# Altium PCB Throughhole final PCB.PcbDoc
Units mm, origin at the board's own origin, x right, y up, seen from the top; angles counter-clockwise.
Board outline 85 x 85 mm, 2 copper layers (Top Layer, Bottom Layer); 27 components, 24 nets, 117 pads, 39 vias.
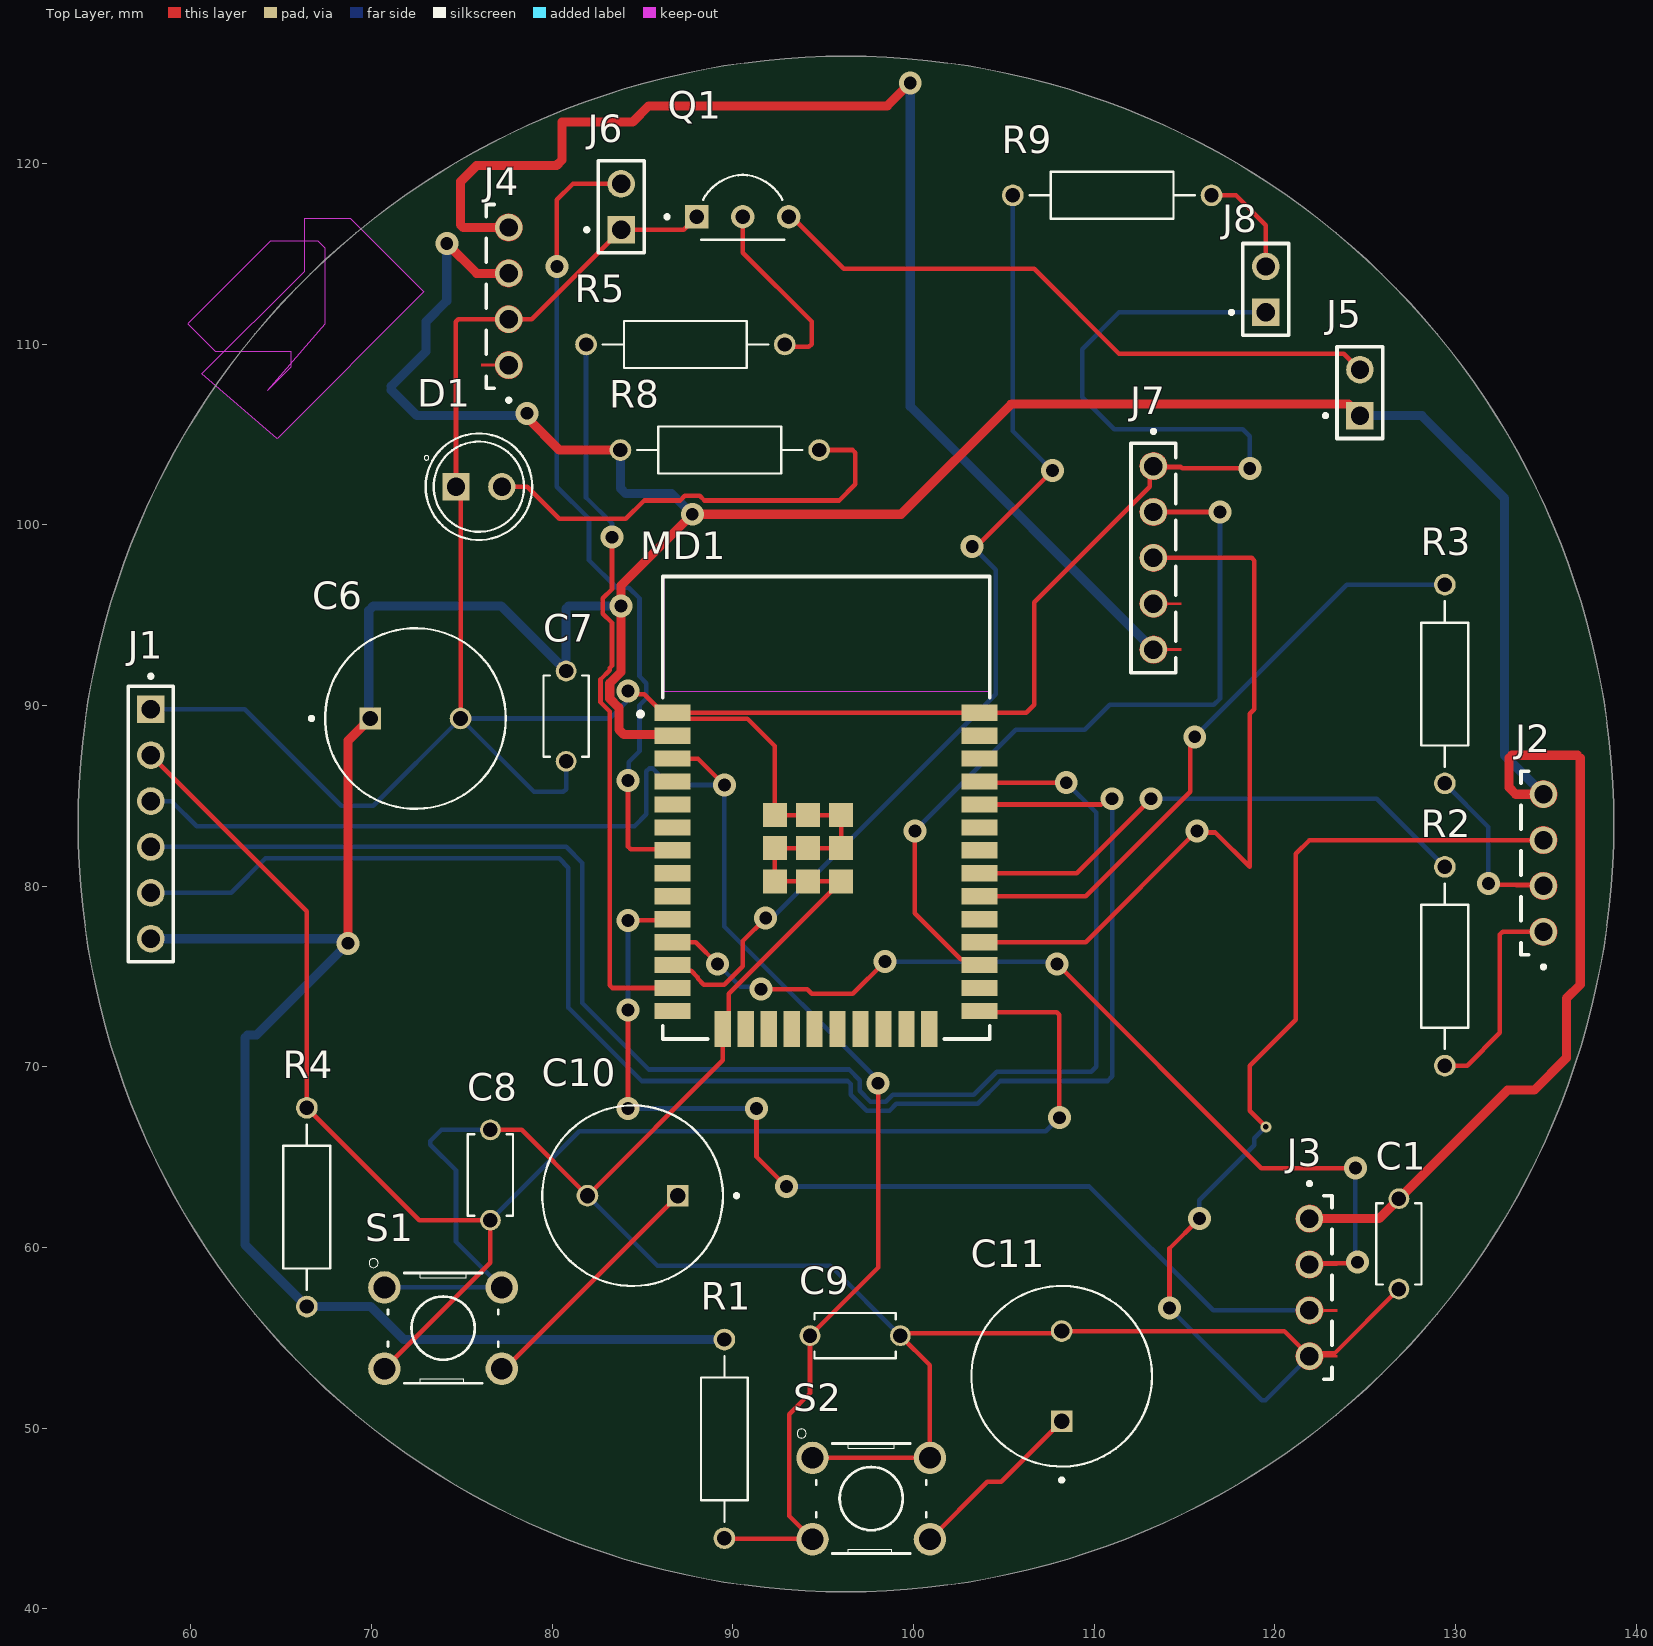
[diagram p0: Top Layer view]
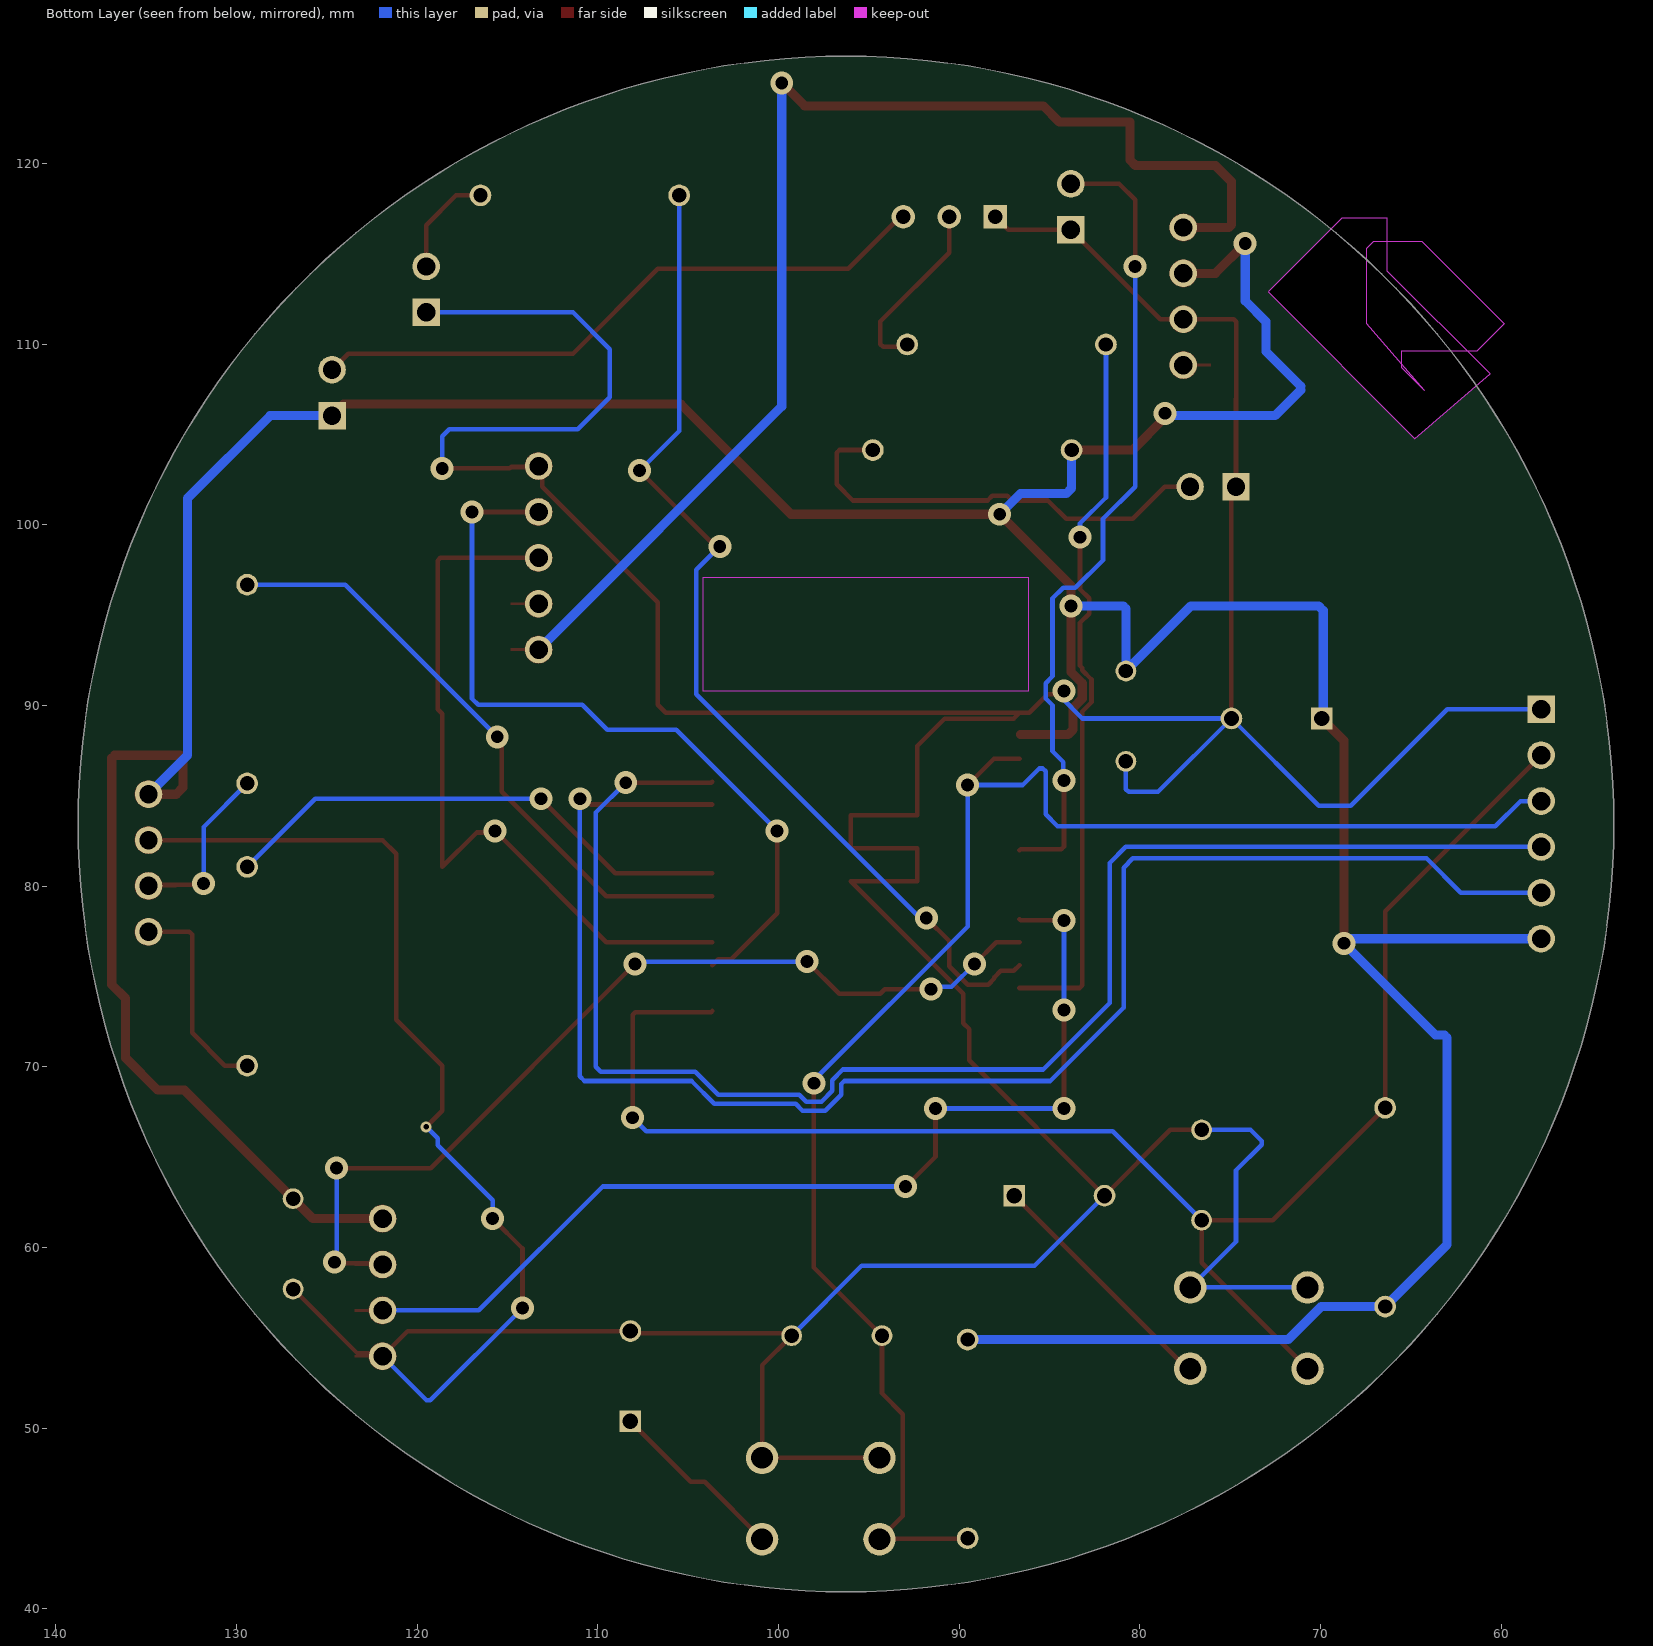
[diagram p1: Bottom Layer view, seen from below]

## Layer stack, top to bottom
Top Solder: solder mask 0.0102, Solder Resist, Dk 3.5
Top Layer: signal copper 0.0356
Dielectric 1: dielectric 0.32, FR-4, Dk 4.8
Bottom Layer: signal copper 0.0356
Bottom Solder: solder mask 0.0102, Solder Resist, Dk 3.5

## Board outline
53.766,83.439 ccw(c96.266,83.439) 96.266,40.939 ccw(c96.266,83.439) 138.766,83.439 ccw(c96.266,83.439) 96.266,125.939 ccw(c96.266,83.439)
cut-out: 67.437,111.125 67.437,115.316 67.056,115.697 64.389,115.697 59.817,111.125 61.341,109.601 65.532,109.601 65.532,108.712 64.262,107.442
cut-out: 60.61,108.362 66.294,114.046 66.294,116.967 68.834,116.967 72.898,112.903 64.77,104.775

## Design rules (kind name [scope] priority, off if disabled: settings)
BoardOutlineClearance [All] p1: gap=0.2 ignorepadtopadclearanceinfootprint=FALSE
Clearance [All] p1: gap=0.127 ignorepadtopadclearanceinfootprint=FALSE except(0.25: Arc-Hole Track-Hole SMDPad-Hole THPad-Hole Via-Hole Fill-Hole Poly-Hole Region-Hole Text-Hole)
ComponentClearance [All] p1: gap=0.127 collisioncheckmode=3 verticalgap=0.127 showdistances=TRUE
DiffPairsRouting [All] p1: maxlimit=0.254 minlimit=0.127 mostfreqgap=0.127 toplayer_minwidth=0.127 toplayer_maxwidth=25.4 toplayer_prefwidth=0.127 bottomlayer_minwidth=0.127 bottomlayer_maxwidth=25.4 bottomlayer_prefwidth=0.127 maxuncoupledlength=12.7
Height [All] p1: minheight=0 maxheight=1816.048 prefheight=12.7
HoleSize [All] p1: absolutevalues=TRUE maxlimit=6.3 minlimit=0.3 maxpercent=80.000 minpercent=20.000
HoleToHoleClearance [All] p1: gap=0.25 allowstackedmicrovias=FALSE
MinimumAnnularRing [All] p1: minimumring=0.076
MinimumSolderMaskSliver [All] p1: minsoldermaskwidth=0
PlaneClearance [All] p1: clearance=0.127
PlaneConnect PlaneConnectPowerPads [InPadClass('PowerPads')] p1: planeconnectstyle=Direct reliefexpansion=0.508 reliefentries=4 reliefconductorwidth=0.254 reliefairgap=0.254
PlaneConnect [All] p2: pad.planeconnectstyle=Relief pad.reliefexpansion=0.3 pad.reliefentries=4 pad.reliefconductorwidth=0.127 pad.reliefairgap=0.127 via.planeconnectstyle=Direct via.reliefexpansion=0.3 via.reliefentries=4 via.reliefconductorwidth=0.127 via.reliefairgap=0.127
PolygonConnect PolygonConnectPowerPads [All vs (InPadClass('PowerPads'))] p1: connectstyle=Direct reliefconductorwidth=0.254 reliefentries=4 polygonreliefangle="90 Angle" airgapwidth=0.254
PolygonConnect [All] p2: thpad.connectstyle=Relief thpad.reliefconductorwidth=0.127 thpad.reliefentries=4 thpad.polygonreliefangle="90 Angle" thpad.airgapwidth=0.127 smdpad.connectstyle=Relief smdpad.reliefconductorwidth=0.127 smdpad.reliefentries=4 smdpad.polygonreliefangle="90 Angle" smdpad.airgapwidth=0.127 via.connectstyle=Direct via.reliefconductorwidth=0.127 via.reliefentries=4 via.polygonreliefangle="90 Angle" via.airgapwidth=0.127
RoutingVias [All] p1: holewidth=0.3 width=0.6 viastyle="Through Hole" minholewidth=0.3 minwidth=0.6 maxholewidth=0.6 maxwidth=6.6
SilkToSilkClearance [All] p1: silktosilkclearance=0
SilkToSolderMaskClearance [IsPad] p1: minsilkscreentomaskgap=0.127 clearancetoexposedcopper=TRUE
SolderMaskExpansion [All] p1: expansion=0.075 istentingtop=FALSE
Width [All] p1: maxlimit=25.4 minlimit=0.127 preferedwidth=0.127 minimp=50.000000 maximp=50.000000 favimp=50.000000
20 further rules are at their usual default settings.

## Components (designator, comment, footprint, x,y, rotation, side; value= is the part's Value field where it differs from the comment)
C1 "0.1uf" CAPRB500W50L450T250H550 126.873,60.198 r270 top
C6 "10uf" CAPPRD500W60D1000H2200 72.43,89.281 r0 top
C7 "0.1uf" CAPRB500W50L450T250H550 80.772,89.408 r90 top
C8 "0.1uf" CAPRB500W50L450T250H550 76.581,64.008 r90 top
C9 "0.1uf" CAPRB500W50L450T250H550 96.774,55.118 r180 top
C10 "10uf" CAPPRD500W60D1000H2200 84.455,62.865 r180 top
C11 "10uf" CAPPRD500W60D1000H2200 108.204,52.872 r90 top
D1 "WP7113ID" LED_WP7113ID 75.946,102.108 r0 top
J1 "Boot" SAMTEC_HMTSW-106-X-X-S-X 57.785,83.439 r90 top
J2 "MPU 6050" SAMTEC_MTLW-104-X-X-S-X 134.874,81.28 r270 top
J3 "M8N" SAMTEC_MTLW-104-X-X-S-X 121.92,57.785 r90 top
J4 "Supplies" SAMTEC_MTLW-104-X-X-S-X 77.597,112.649 r270 top
J5 "Buzzer" SAMTEC_MTSW-101-X-X-D-X 124.714,107.315 r0 top
J6 "reset sw" SAMTEC_MTSW-101-X-X-D-X 83.82,117.602 r0 top
J7 "GSM" SAMTEC_MTLW-105-06-T-S-135 113.284,98.171 r90 top
J8 "Limit sw" SAMTEC_MTSW-101-X-X-D-X 119.507,113.03 r0 top
MD1 "ESP32-WROOM-32D" FP-ESP32-WROOM-32D-MFG 95.164,84.339 r0 top
Q1 "2N2222A" TO92254P470H750-3 90.551,119.38 r0 top
R1 "10k" RESAD1100W55L680D260 89.535,49.403 r270 top value=10kR
R2 "4.7k" RESAD1100W55L680D260 129.413,75.565 r90 top value=4.7kR
R3 "10k" RESAD1100W55L680D260 129.413,91.186 r90 top value=10kR
R4 "10k" RESAD1100W55L680D260 66.421,62.23 r90 top value=10kR
R5 "10k" RESAD1100W55L680D260 87.376,109.982 r180 top value=10kR
R8 "10k" RESAD1100W55L680D260 89.281,104.14 r180 top value=10kR
R9 "10k" RESAD1100W55L680D260 110.998,118.237 r180 top value=10kR
S1 "Sw" SW_TS-1109 73.966,55.535 r0 top
S2 "Sw" SW_TS-1109 97.663,46.101 r0 top

## Footprints (in the part's own frame and the unit in brackets; to place one, negate y for a bottom-side part, rotate by r counter-clockwise, add the part's x,y. Pads: shape width x height; smd on the part's side, far side on the other; paste and mask are expansions set on the pad)
CAPPRD500W60D1000H2200 [mm]
  rect 1.2x1.2 / inner round 1.2 / far side rect 1.2x1.2 hole 0.85: 1(-2.5,0)
  round 1.2 hole 0.85: 2(2.5,0)
  silkscreen extent -5.85,-5 5,5
CAPRB500W50L450T250H550 [mm]
  round 1.15 hole 0.8: 1(-2.5,0) 2(2.5,0)
  silkscreen extent -2.25,-1.25 2.25,1.25
FP-ESP32-WROOM-32D-MFG [mm]
  rect 2x0.9 smd paste+0 mask+0: 1(-8.5,5.26) 2(-8.5,3.99) 3(-8.5,2.72) 4(-8.5,1.45) 5(-8.5,0.18) 6(-8.5,-1.09) 7(-8.5,-2.36) 8(-8.5,-3.63) 9(-8.5,-4.9) 10(-8.5,-6.17) 11(-8.5,-7.44) 12(-8.5,-8.71) 13(-8.5,-9.98) 14(-8.5,-11.25) 25(8.5,-11.25) 26(8.5,-9.98) 27(8.5,-8.71) 28(8.5,-7.44) 29(8.5,-6.17) 30(8.5,-4.9) 31(8.5,-3.63) 32(8.5,-2.36) 33(8.5,-1.09) 34(8.5,0.18) 35(8.5,1.45) 36(8.5,2.72) 37(8.5,3.99) 38(8.5,5.26)
  rect 0.9x2 smd paste+0 mask+0: 15(-5.715,-12.25) 16(-4.445,-12.25) 17(-3.175,-12.25) 18(-1.905,-12.25) 19(-0.635,-12.25) 20(0.635,-12.25) 21(1.905,-12.25) 22(3.175,-12.25) 23(4.445,-12.25) 24(5.715,-12.25)
  rect 1.33x1.33 smd paste+0 mask+0: 39(-2.835,-4.075) 39(-2.835,-2.24) 39(-2.835,-0.405) 39(-1,-4.075) 39(-1,-2.24) 39(-1,-0.405) 39(0.835,-4.075) 39(0.835,-2.24) 39(0.835,-0.405)
  Keep-Out Layer region: -9,6.45 9,6.45 9,12.75 -9,12.75
  Keep-Out Layer region: -9,6.45 9,6.45 9,12.75 -9,12.75
  silkscreen extent -10.4,-12.8 9.05,12.8, body extent -9.6,-13.35 9.6,12.9, height 0.25
LED_WP7113ID [mm]
  round 1.508 hole 1: A(1.27,0)
  rect 1.508x1.508 / inner round 1.508 / far side rect 1.508x1.508 hole 1: C(-1.27,0)
  silkscreen extent -3.03,-2.95 2.95,2.95, body extent -2.5,-2.95 2.95,2.95, height 9.6
RESAD1100W55L680D260 [mm]
  round 1.2 hole 0.8: 1(-5.5,0) 2(5.5,0)
  silkscreen extent -4.58,-1.3 4.58,1.3, body extent -5.77,-1.2 5.77,1.2, height 2.4
SAMTEC_HMTSW-106-X-X-S-X [mm]
  rect 1.53x1.53 / inner round 1.53 / far side rect 1.53x1.53 hole 1.02: 01(6.35,0)
  round 1.53 hole 1.02: 02(3.81,0) 03(1.27,0) 04(-1.27,0) 05(-3.81,0) 06(-6.35,0)
  silkscreen extent -7.62,-1.24 8.28,1.24
SAMTEC_MTLW-104-X-X-S-X [mm]
  round 1.52 hole 1.02: 01(3.81,0) 02(1.27,0) 03(-1.27,0) 04(-3.81,0)
  Top Layer region: -3.731,0.756 -3.652,0.743 -3.575,0.723 -3.501,0.694 -3.43,0.658 -3.363,0.615 -3.301,0.565 -3.245,0.509 -3.195,0.447 -3.152,0.38 -3.116,0.309 -3.087,0.235 -3.067,0.158 -3.054,0.079 -3.05,0 -3.051,-0.038 -3.054,-0.076 -3.058,-0.113 -3.065,-0.151 -3.073,-0.187 -3.083,-0.224 -3.095,-0.259 -3.109,-0.294 -3.124,-0.329 -3.141,-0.363 -3.16,-0.395 -3.18,-0.427 -3.202,-0.458 -3.225,-0.487 -3.25,-0.516 -3.276,-0.543 -3.304,-0.569 -3.333,-0.593 -3.362,-0.616 -3.393,-0.638 -3.425,-0.658 -3.458,-0.676 -3.492,-0.692 -3.527,-0.707 -3.562,-0.721 -3.598,-0.732 -3.634,-0.742 -3.671,-0.75 -3.708,-0.756 -3.745,-0.76 -3.745,-1.53 -3.875,-1.53 -3.875,-0.76 -3.912,-0.756 -3.949,-0.75 -3.986,-0.742 -4.022,-0.732 -4.058,-0.721 -4.093,-0.707 -4.128,-0.692 -4.162,-0.676 -4.195,-0.658 -4.227,-0.638 -4.258,-0.616 -4.287,-0.593 -4.316,-0.569 -4.344,-0.543 -4.37,-0.516 -4.395,-0.487 -4.418,-0.458 -4.44,-0.427 -4.46,-0.395 -4.479,-0.363 -4.496,-0.329 -4.511,-0.294 -4.525,-0.259 -4.537,-0.224 -4.547,-0.187 -4.555,-0.151 -4.562,-0.113 -4.566,-0.076 -4.569,-0.038 -4.57,0 -4.566,0.079 -4.553,0.158 -4.533,0.235 -4.504,0.309 -4.468,0.38 -4.425,0.447 -4.375,0.509 -4.319,0.565 -4.257,0.615 -4.19,0.658 -4.119,0.694 -4.045,0.723 -3.968,0.743 -3.889,0.756 -3.81,0.76
  Top Layer region: -1.191,0.756 -1.112,0.743 -1.035,0.723 -0.961,0.694 -0.89,0.658 -0.823,0.615 -0.761,0.565 -0.705,0.509 -0.655,0.447 -0.612,0.38 -0.576,0.309 -0.547,0.235 -0.527,0.158 -0.514,0.079 -0.51,0 -0.511,-0.038 -0.514,-0.076 -0.518,-0.113 -0.525,-0.151 -0.533,-0.187 -0.543,-0.224 -0.555,-0.259 -0.569,-0.294 -0.584,-0.329 -0.601,-0.363 -0.62,-0.395 -0.64,-0.427 -0.662,-0.458 -0.685,-0.487 -0.71,-0.516 -0.736,-0.543 -0.764,-0.569 -0.793,-0.593 -0.822,-0.616 -0.853,-0.638 -0.885,-0.658 -0.918,-0.676 -0.952,-0.692 -0.987,-0.707 -1.022,-0.721 -1.058,-0.732 -1.094,-0.742 -1.131,-0.75 -1.168,-0.756 -1.205,-0.76 -1.205,-1.53 -1.335,-1.53 -1.335,-0.76 -1.372,-0.756 -1.409,-0.75 -1.446,-0.742 -1.482,-0.732 -1.518,-0.721 -1.553,-0.707 -1.588,-0.692 -1.622,-0.676 -1.655,-0.658 -1.687,-0.638 -1.718,-0.616 -1.747,-0.593 -1.776,-0.569 -1.804,-0.543 -1.83,-0.516 -1.855,-0.487 -1.878,-0.458 -1.9,-0.427 -1.92,-0.395 -1.939,-0.363 -1.956,-0.329 -1.971,-0.294 -1.985,-0.259 -1.997,-0.224 -2.007,-0.187 -2.015,-0.151 -2.022,-0.113 -2.026,-0.076 -2.029,-0.038 -2.03,0 -2.026,0.079 -2.013,0.158 -1.993,0.235 -1.964,0.309 -1.928,0.38 -1.885,0.447 -1.835,0.509 -1.779,0.565 -1.717,0.615 -1.65,0.658 -1.579,0.694 -1.505,0.723 -1.428,0.743 -1.349,0.756 -1.27,0.76
  Top Layer region: 1.349,0.756 1.428,0.743 1.505,0.723 1.579,0.694 1.65,0.658 1.717,0.615 1.779,0.565 1.835,0.509 1.885,0.447 1.928,0.38 1.964,0.309 1.993,0.235 2.013,0.158 2.026,0.079 2.03,0 2.029,-0.038 2.026,-0.076 2.022,-0.113 2.015,-0.151 2.007,-0.187 1.997,-0.224 1.985,-0.259 1.971,-0.294 1.956,-0.329 1.939,-0.363 1.92,-0.395 1.9,-0.427 1.878,-0.458 1.855,-0.487 1.83,-0.516 1.804,-0.543 1.776,-0.569 1.747,-0.593 1.718,-0.616 1.687,-0.638 1.655,-0.658 1.622,-0.676 1.588,-0.692 1.553,-0.707 1.518,-0.721 1.482,-0.732 1.446,-0.742 1.409,-0.75 1.372,-0.756 1.335,-0.76 1.335,-1.53 1.205,-1.53 1.205,-0.76 1.168,-0.756 1.131,-0.75 1.094,-0.742 1.058,-0.732 1.022,-0.721 0.987,-0.707 0.952,-0.692 0.918,-0.676 0.885,-0.658 0.853,-0.638 0.822,-0.616 0.793,-0.593 0.764,-0.569 0.736,-0.543 0.71,-0.516 0.685,-0.487 0.662,-0.458 0.64,-0.427 0.62,-0.395 0.601,-0.363 0.584,-0.329 0.569,-0.294 0.555,-0.259 0.543,-0.224 0.533,-0.187 0.525,-0.151 0.518,-0.113 0.514,-0.076 0.511,-0.038 0.51,0 0.514,0.079 0.527,0.158 0.547,0.235 0.576,0.309 0.612,0.38 0.655,0.447 0.705,0.509 0.761,0.565 0.823,0.615 0.89,0.658 0.961,0.694 1.035,0.723 1.112,0.743 1.191,0.756 1.27,0.76
  Top Layer region: 3.889,0.756 3.968,0.743 4.045,0.723 4.119,0.694 4.19,0.658 4.257,0.615 4.319,0.565 4.375,0.509 4.425,0.447 4.468,0.38 4.504,0.309 4.533,0.235 4.553,0.158 4.566,0.079 4.57,0 4.569,-0.038 4.566,-0.076 4.562,-0.113 4.555,-0.151 4.547,-0.187 4.537,-0.224 4.525,-0.259 4.511,-0.294 4.496,-0.329 4.479,-0.363 4.46,-0.395 4.44,-0.427 4.418,-0.458 4.395,-0.487 4.37,-0.516 4.344,-0.543 4.316,-0.569 4.287,-0.593 4.258,-0.616 4.227,-0.638 4.195,-0.658 4.162,-0.676 4.128,-0.692 4.093,-0.707 4.058,-0.721 4.022,-0.732 3.986,-0.742 3.949,-0.75 3.912,-0.756 3.875,-0.76 3.875,-1.53 3.745,-1.53 3.745,-0.76 3.708,-0.756 3.671,-0.75 3.634,-0.742 3.598,-0.732 3.562,-0.721 3.527,-0.707 3.492,-0.692 3.458,-0.676 3.425,-0.658 3.393,-0.638 3.362,-0.616 3.333,-0.593 3.304,-0.569 3.276,-0.543 3.25,-0.516 3.225,-0.487 3.202,-0.458 3.18,-0.427 3.16,-0.395 3.141,-0.363 3.124,-0.329 3.109,-0.294 3.095,-0.259 3.083,-0.224 3.073,-0.187 3.065,-0.151 3.058,-0.113 3.054,-0.076 3.051,-0.038 3.05,0 3.054,0.079 3.067,0.158 3.087,0.235 3.116,0.309 3.152,0.38 3.195,0.447 3.245,0.509 3.301,0.565 3.363,0.615 3.43,0.658 3.501,0.694 3.575,0.723 3.652,0.743 3.731,0.756 3.81,0.76
  silkscreen extent -5.08,-1.24 5.85,0.1
SAMTEC_MTLW-105-06-T-S-135 [mm]
  round 1.52 hole 1.02: 01(5.08,0) 02(2.54,0) 03(0,0) 04(-2.54,0) 05(-5.08,0)
  Top Layer region: -5.001,0.756 -4.922,0.743 -4.845,0.723 -4.771,0.694 -4.7,0.658 -4.633,0.615 -4.571,0.565 -4.515,0.509 -4.465,0.447 -4.422,0.38 -4.386,0.309 -4.357,0.235 -4.337,0.158 -4.324,0.079 -4.32,0 -4.321,-0.038 -4.324,-0.076 -4.328,-0.113 -4.335,-0.151 -4.343,-0.187 -4.353,-0.224 -4.365,-0.259 -4.379,-0.294 -4.394,-0.329 -4.411,-0.363 -4.43,-0.395 -4.45,-0.427 -4.472,-0.458 -4.495,-0.487 -4.52,-0.516 -4.546,-0.543 -4.574,-0.569 -4.603,-0.593 -4.632,-0.616 -4.663,-0.638 -4.695,-0.658 -4.728,-0.676 -4.762,-0.692 -4.797,-0.707 -4.832,-0.721 -4.868,-0.732 -4.904,-0.742 -4.941,-0.75 -4.978,-0.756 -5.015,-0.76 -5.015,-1.53 -5.145,-1.53 -5.145,-0.76 -5.182,-0.756 -5.219,-0.75 -5.256,-0.742 -5.292,-0.732 -5.328,-0.721 -5.363,-0.707 -5.398,-0.692 -5.432,-0.676 -5.465,-0.658 -5.497,-0.638 -5.528,-0.616 -5.557,-0.593 -5.586,-0.569 -5.614,-0.543 -5.64,-0.516 -5.665,-0.487 -5.688,-0.458 -5.71,-0.427 -5.73,-0.395 -5.749,-0.363 -5.766,-0.329 -5.781,-0.294 -5.795,-0.259 -5.807,-0.224 -5.817,-0.187 -5.825,-0.151 -5.832,-0.113 -5.836,-0.076 -5.839,-0.038 -5.84,0 -5.836,0.079 -5.823,0.158 -5.803,0.235 -5.774,0.309 -5.738,0.38 -5.695,0.447 -5.645,0.509 -5.589,0.565 -5.527,0.615 -5.46,0.658 -5.389,0.694 -5.315,0.723 -5.238,0.743 -5.159,0.756 -5.08,0.76
  Top Layer region: -2.461,0.756 -2.382,0.743 -2.305,0.723 -2.231,0.694 -2.16,0.658 -2.093,0.615 -2.031,0.565 -1.975,0.509 -1.925,0.447 -1.882,0.38 -1.846,0.309 -1.817,0.235 -1.797,0.158 -1.784,0.079 -1.78,0 -1.781,-0.038 -1.784,-0.076 -1.788,-0.113 -1.795,-0.151 -1.803,-0.187 -1.813,-0.224 -1.825,-0.259 -1.839,-0.294 -1.854,-0.329 -1.871,-0.363 -1.89,-0.395 -1.91,-0.427 -1.932,-0.458 -1.955,-0.487 -1.98,-0.516 -2.006,-0.543 -2.034,-0.569 -2.063,-0.593 -2.092,-0.616 -2.123,-0.638 -2.155,-0.658 -2.188,-0.676 -2.222,-0.692 -2.257,-0.707 -2.292,-0.721 -2.328,-0.732 -2.364,-0.742 -2.401,-0.75 -2.438,-0.756 -2.475,-0.76 -2.475,-1.53 -2.605,-1.53 -2.605,-0.76 -2.642,-0.756 -2.679,-0.75 -2.716,-0.742 -2.752,-0.732 -2.788,-0.721 -2.823,-0.707 -2.858,-0.692 -2.892,-0.676 -2.925,-0.658 -2.957,-0.638 -2.988,-0.616 -3.017,-0.593 -3.046,-0.569 -3.074,-0.543 -3.1,-0.516 -3.125,-0.487 -3.148,-0.458 -3.17,-0.427 -3.19,-0.395 -3.209,-0.363 -3.226,-0.329 -3.241,-0.294 -3.255,-0.259 -3.267,-0.224 -3.277,-0.187 -3.285,-0.151 -3.292,-0.113 -3.296,-0.076 -3.299,-0.038 -3.3,0 -3.296,0.079 -3.283,0.158 -3.263,0.235 -3.234,0.309 -3.198,0.38 -3.155,0.447 -3.105,0.509 -3.049,0.565 -2.987,0.615 -2.92,0.658 -2.849,0.694 -2.775,0.723 -2.698,0.743 -2.619,0.756 -2.54,0.76
  Top Layer region: 0.079,0.756 0.158,0.743 0.235,0.723 0.309,0.694 0.38,0.658 0.447,0.615 0.509,0.565 0.565,0.509 0.615,0.447 0.658,0.38 0.694,0.309 0.723,0.235 0.743,0.158 0.756,0.079 0.76,0 0.759,-0.038 0.756,-0.076 0.752,-0.113 0.745,-0.151 0.737,-0.187 0.727,-0.224 0.715,-0.259 0.701,-0.294 0.686,-0.329 0.669,-0.363 0.65,-0.395 0.63,-0.427 0.608,-0.458 0.585,-0.487 0.56,-0.516 0.534,-0.543 0.506,-0.569 0.477,-0.593 0.448,-0.616 0.417,-0.638 0.385,-0.658 0.352,-0.676 0.318,-0.692 0.283,-0.707 0.248,-0.721 0.212,-0.732 0.176,-0.742 0.139,-0.75 0.102,-0.756 0.065,-0.76 0.065,-1.53 -0.065,-1.53 -0.065,-0.76 -0.102,-0.756 -0.139,-0.75 -0.176,-0.742 -0.212,-0.732 -0.248,-0.721 -0.283,-0.707 -0.318,-0.692 -0.352,-0.676 -0.385,-0.658 -0.417,-0.638 -0.448,-0.616 -0.477,-0.593 -0.506,-0.569 -0.534,-0.543 -0.56,-0.516 -0.585,-0.487 -0.608,-0.458 -0.63,-0.427 -0.65,-0.395 -0.669,-0.363 -0.686,-0.329 -0.701,-0.294 -0.715,-0.259 -0.727,-0.224 -0.737,-0.187 -0.745,-0.151 -0.752,-0.113 -0.756,-0.076 -0.759,-0.038 -0.76,0 -0.756,0.079 -0.743,0.158 -0.723,0.235 -0.694,0.309 -0.658,0.38 -0.615,0.447 -0.565,0.509 -0.509,0.565 -0.447,0.615 -0.38,0.658 -0.309,0.694 -0.235,0.723 -0.158,0.743 -0.079,0.756 0,0.76
  Top Layer region: 2.619,0.756 2.698,0.743 2.775,0.723 2.849,0.694 2.92,0.658 2.987,0.615 3.049,0.565 3.105,0.509 3.155,0.447 3.198,0.38 3.234,0.309 3.263,0.235 3.283,0.158 3.296,0.079 3.3,0 3.299,-0.038 3.296,-0.076 3.292,-0.113 3.285,-0.151 3.277,-0.187 3.267,-0.224 3.255,-0.259 3.241,-0.294 3.226,-0.329 3.209,-0.363 3.19,-0.395 3.17,-0.427 3.148,-0.458 3.125,-0.487 3.1,-0.516 3.074,-0.543 3.046,-0.569 3.017,-0.593 2.988,-0.616 2.957,-0.638 2.925,-0.658 2.892,-0.676 2.858,-0.692 2.823,-0.707 2.788,-0.721 2.752,-0.732 2.716,-0.742 2.679,-0.75 2.642,-0.756 2.605,-0.76 2.605,-1.53 2.475,-1.53 2.475,-0.76 2.438,-0.756 2.401,-0.75 2.364,-0.742 2.328,-0.732 2.292,-0.721 2.257,-0.707 2.222,-0.692 2.188,-0.676 2.155,-0.658 2.123,-0.638 2.092,-0.616 2.063,-0.593 2.034,-0.569 2.006,-0.543 1.98,-0.516 1.955,-0.487 1.932,-0.458 1.91,-0.427 1.89,-0.395 1.871,-0.363 1.854,-0.329 1.839,-0.294 1.825,-0.259 1.813,-0.224 1.803,-0.187 1.795,-0.151 1.788,-0.113 1.784,-0.076 1.781,-0.038 1.78,0 1.784,0.079 1.797,0.158 1.817,0.235 1.846,0.309 1.882,0.38 1.925,0.447 1.975,0.509 2.031,0.565 2.093,0.615 2.16,0.658 2.231,0.694 2.305,0.723 2.382,0.743 2.461,0.756 2.54,0.76
  Top Layer region: 5.159,0.756 5.238,0.743 5.315,0.723 5.389,0.694 5.46,0.658 5.527,0.615 5.589,0.565 5.645,0.509 5.695,0.447 5.738,0.38 5.774,0.309 5.803,0.235 5.823,0.158 5.836,0.079 5.84,0 5.839,-0.038 5.836,-0.076 5.832,-0.113 5.825,-0.151 5.817,-0.187 5.807,-0.224 5.795,-0.259 5.781,-0.294 5.766,-0.329 5.749,-0.363 5.73,-0.395 5.71,-0.427 5.688,-0.458 5.665,-0.487 5.64,-0.516 5.614,-0.543 5.586,-0.569 5.557,-0.593 5.528,-0.616 5.497,-0.638 5.465,-0.658 5.432,-0.676 5.398,-0.692 5.363,-0.707 5.328,-0.721 5.292,-0.732 5.256,-0.742 5.219,-0.75 5.182,-0.756 5.145,-0.76 5.145,-1.53 5.015,-1.53 5.015,-0.76 4.978,-0.756 4.941,-0.75 4.904,-0.742 4.868,-0.732 4.832,-0.721 4.797,-0.707 4.762,-0.692 4.728,-0.676 4.695,-0.658 4.663,-0.638 4.632,-0.616 4.603,-0.593 4.574,-0.569 4.546,-0.543 4.52,-0.516 4.495,-0.487 4.472,-0.458 4.45,-0.427 4.43,-0.395 4.411,-0.363 4.394,-0.329 4.379,-0.294 4.365,-0.259 4.353,-0.224 4.343,-0.187 4.335,-0.151 4.328,-0.113 4.324,-0.076 4.321,-0.038 4.32,0 4.324,0.079 4.337,0.158 4.357,0.235 4.386,0.309 4.422,0.38 4.465,0.447 4.515,0.509 4.571,0.565 4.633,0.615 4.7,0.658 4.771,0.694 4.845,0.723 4.922,0.743 5.001,0.756 5.08,0.76
  silkscreen extent -6.35,-1.24 7.1,1.24
SAMTEC_MTSW-101-X-X-D-X [mil]
  rect 60x60 / inner round 60 / far side rect 60x60 hole 40: 01(0,-50)
  round 60 hole 40: 02(0,50)
  silkscreen extent -79,-100 50,100
SW_TS-1109 [mm]
  round 1.8 hole 1.2: 1(-3.25,2.25) 2(3.25,2.25) 3(-3.25,-2.25) 4(3.25,-2.25)
  silkscreen extent -4.1,-3.05 3.05,3.85
TO92254P470H750-3 [mm]
  rect 1.298x1.298 / inner round 1.298 / far side rect 1.298x1.298 hole 0.79: 1(-2.54,-2.33)
  round 1.298 hole 0.79: 2(0,-2.33) 3(2.54,-2.33)
  silkscreen extent -4.29,-3.6 2.3,0, body extent -2.74,-1.27 2.74,2.33, height 8.09

## Part data
C1 C7 C8 C9: "CAP CER 0.1UF 100V X7R RADIAL", Package=None, Check_prices=https://www.snapeda.com/parts/FK24X7R2A104KN000/TDK/view-part/?ref=eda, MF=TDK, MP=FK24X7R2A104KN000, SnapEDA_Link=https://www.snapeda.com/parts/FK24X7R2A104KN000/TDK/view-part/?ref=snap
C6 C10 C11: "CAP ALUM 10UF 20% 350V RADIAL", Package=None, Check_prices=https://www.snapeda.com/parts/B43890A4106M000/EPCOS/view-part/?ref=eda, MF=EPCOS, MP=B43890A4106M000, SnapEDA_Link=https://www.snapeda.com/parts/B43890A4106M000/EPCOS/view-part/?ref=snap
D1: "Red 617nm LED Indication - Discrete 2V Radial", Package="Radial Kingbright", Availability="In Stock", Check_prices=https://www.snapeda.com/parts/WP7113ID/Kingbright/view-part/?ref=eda, MF=Kingbright, MP=WP7113ID, Price=None, Purchase-URL=https://pricing.snapeda.com/search/part/WP7113ID/?ref=eda, SnapEDA_Link=https://www.snapeda.com/parts/WP7113ID/Kingbright/view-part/?ref=snap
J1: library part connector, ".100 High-Temp Variable Post Height Terminal Strip", Package=None, Check_prices=https://www.snapeda.com/parts/HMTSW-106-07-T-S-200/Samtec/view-part/?ref=eda, MF=SAMTEC, MP=HMTSW-106-07-T-S-200, SnapEDA_Link=https://www.snapeda.com/parts/HMTSW-106-07-T-S-200/Samtec/view-part/?ref=snap
J2 J3 J4: library part MTLW-104-X-X-S-X, Package=None, Availability=Unavailable, MF="{'manufacturer': u'Samtec Inc.'}", MP=MTLW-104-X-X-S-X, Price=None
J5 J6 J8: library part MTSW-101-X-X-D-X, "Variable Height PCB Header Strips, 0.100 pitch", Package=None, Check_prices=https://www.snapeda.com/parts/MTSW-101-09-L-D-210/Samtec/view-part/?ref=eda, MF=SAMTEC, MP=MTSW-101-09-L-D-210, SnapEDA_Link=https://www.snapeda.com/parts/MTSW-101-09-L-D-210/Samtec/view-part/?ref=snap
J7: library part MTLW-105-06-T-S-135, Package=None, Availability=Unavailable, MP=MTLW-105-06-T-S-135, Price=None
MD1: library part esp32wroom32d, "WIFI MODULE 32MBITS SPI FLASH", Manufacturer="Espressif Systems", Max Frequency=2484MHz, Max Supply Voltage=3.6V, Min Supply Voltage=3V, Nominal Supply Current=500mA, Temperature="-40°C to +85°C", Temperature Range High=+85°C, Temperature Range Low=-40°C, Automotive=No, Bandwidth=72MHz, Category=UNK, ComponentLink2Description=Datasheet, ComponentLink2URL=https://www.espressif.com/sites/default/files/documentation/esp32-wroom-32d_esp32-wroom-32u_datasheet_en.pdf, Data Rate=150Mbits/s, Device Class L1="Integrated Circuits (ICs)", Device Class L2="RF Semiconductors and Devices", Device Class L3=Transceivers, Digikey Description="WIFI MODULE 32MBITS SPI FLASH", Height=3.2mm, Interface=I2C,SPI,UART,Ethernet,I2S,Other, Lead Free=Yes, Manufacturer Part Number=ESP32-WROOM-32D, Mouser Description="Wi-Fi/BT BLE Module ESP32-D0WD, SPI Flash, UART, P", Number Of Adc Channels=16, Number Of Gpio=32, Octopart=https://octopart.com/esp32-wroom-32d-espressif+systems-91040050, Package=ESP32-WROOM-32D, RoHS=TRUE, Sensitivity=-98dBm
Q1: "BJT, TO-92, 40V, 600mA, NPN, 0.625W, 150Â°C", Package="TO-92 Diotec", Check_prices=https://www.snapeda.com/parts/2N2222A/Diotec/view-part/?ref=eda, MF="Diotec Semiconductor", MP=2N2222A, SnapEDA_Link=https://www.snapeda.com/parts/2N2222A/Diotec/view-part/?ref=snap
R1 R3 R4 R5 R8 R9: "Fixed Resistor, Carbon Film, 0.25W, 10000ohm, 250V, 5% +/-Tol, -500,350ppm/Cel, Through Hole Mount", Manufacturer=Yageo, Manufacturer Part Number=CFR-25JR-52-10K, Max Operating Temperature=155°C, Min Operating Temperature=-55°C, Package Length=6.3mm, Package Shape=Tubular, Package Style=AXIAL, Power=250mW, Rated Temperature=70°C, Resistor Type="FIXED RESISTOR", Supplier Part Number=3706249, Temperature Coefficient (ppm/Cel)=500, Tolerance=5%, Working Voltage=250V, Category="Through-Hole Resistors", ComponentLink1Description=https://datasheet.ciiva.com:443/pdfs/VipMasterIC/IC/YAGO/YAGO-S-A0009358724/YAGO-S-A0009358724-1.pdf?src-supplier=IHS+Markit, ComponentLink1URL=https://datasheet.ciiva.com:443/pdfs/VipMasterIC/IC/YAGO/YAGO-S-A0009358724/YAGO-S-A0009358724-1.pdf?src-supplier=IHS+Markit, ComponentLink2Description=http://www.mouser.com/ds/2/447/Yageo%20LR_CFR_2013-595289.pdf?src-supplier=Mouser, ComponentLink2URL=http://www.mouser.com/ds/2/447/Yageo%20LR_CFR_2013-595289.pdf?src-supplier=Mouser, ComponentLink3Description=http://www.yageo.com/documents/recent/Yageo%20LR_CFR_2013.pdf?src-supplier=Digikey, ComponentLink3URL=http://www.yageo.com/documents/recent/Yageo%20LR_CFR_2013.pdf?src-supplier=Digikey, ComponentLink4Description=http://www.yageo.com/documents/recent/Yageo%20LR_CFR_2013.pdf?src-supplier=Avnet, ComponentLink4URL=http://www.yageo.com/documents/recent/Yageo%20LR_CFR_2013.pdf?src-supplier=Avnet, ComponentLink5Description=https://datasheet.octopart.com/CFR-25JR-52-10K-Yageo-datasheet-155367611.pdf?src-supplier=Newark, ComponentLink5URL=https://datasheet.octopart.com/CFR-25JR-52-10K-Yageo-datasheet-155367611.pdf?src-supplier=Newark, ComponentLink6Description=http://www.yageo.com/documents/recent/General%20Type_CFR.pdf?src-supplier=Future+Electronics, ComponentLink6URL=http://www.yageo.com/documents/recent/General%20Type_CFR.pdf?src-supplier=Future+Electronics, ComponentLink7Description=https://datasheet.octopart.com/CFR-25JR-52-10K-Yageo-datasheet-137875058.pdf?src-supplier=Future+Electronics, ComponentLink7URL=https://datasheet.octopart.com/CFR-25JR-52-10K-Yageo-datasheet-137875058.pdf?src-supplier=Future+Electronics, Construction=Cylindrical, JESD-609 Code=e3, Lead Diameter=0.55mm, Mounting Technology="Through Hole", Packaging="Tape and Reel", Pins=2, Pricing="5000=0.0065, 15000=0.0063, 20000=0.0063, 50000=0.0061, 75000=0.006 (USD)", Reach SVHC Compliant=Yes, RoHS=Yes, RoHS Compliant=Yes, Stock=15000, Supplier="Future Electronics", Technology="CARBON FILM", Terminal Finish=Tin, Termination=Wire
R2: "Fixed Resistor, Carbon Film, 0.25W, 4700ohm, 250V, 5% +/-Tol, -500,350ppm/Cel, Through Hole Mount", Manufacturer=Yageo, Manufacturer Part Number=CFR-25JR-52-4K7, Max Operating Temperature=155°C, Min Operating Temperature=-55°C, Package Length=6.3mm, Package Shape=Tubular, Package Style=AXIAL, Power=250mW, Rated Temperature=70°C, Resistor Type="FIXED RESISTOR", Supplier Part Number=13-CFR-25JR-52-4K7CT-ND, Temperature Coefficient (ppm/Cel)=500, Tolerance=5%, Working Voltage=250V, Category="Through-Hole Resistors", ComponentLink1Description=https://datasheet.ciiva.com:443/pdfs/VipMasterIC/IC/YAGO/YAGO-S-A0009358724/YAGO-S-A0009358724-1.pdf?src-supplier=IHS+Markit, ComponentLink1URL=https://datasheet.ciiva.com:443/pdfs/VipMasterIC/IC/YAGO/YAGO-S-A0009358724/YAGO-S-A0009358724-1.pdf?src-supplier=IHS+Markit, ComponentLink2Description=http://www.mouser.com/ds/2/447/Yageo%20LR_CFR_2013-540723.pdf?src-supplier=Mouser, ComponentLink2URL=http://www.mouser.com/ds/2/447/Yageo%20LR_CFR_2013-540723.pdf?src-supplier=Mouser, ComponentLink3Description=http://www.yageo.com/NewPortal/yageodocoutput?fileName=/pdf/throughhole/Yageo_LR_CFR_2013.pdf&src-supplier=Digikey, ComponentLink3URL=http://www.yageo.com/NewPortal/yageodocoutput?fileName=/pdf/throughhole/Yageo_LR_CFR_2013.pdf&src-supplier=Digikey, ComponentLink4Description=http://www.yageo.com/documents/recent/Yageo%20LR_CFR_2013.pdf?src-supplier=Avnet, ComponentLink4URL=http://www.yageo.com/documents/recent/Yageo%20LR_CFR_2013.pdf?src-supplier=Avnet, ComponentLink5Description=http://www.yageo.com/documents/recent/General%20Type_CFR.pdf?src-supplier=Future+Electronics, ComponentLink5URL=http://www.yageo.com/documents/recent/General%20Type_CFR.pdf?src-supplier=Future+Electronics, ComponentLink6Description=https://datasheet.octopart.com/CFR-25JR-52-4K7-Yageo-datasheet-155367611.pdf?src-supplier=Farnell, ComponentLink6URL=https://datasheet.octopart.com/CFR-25JR-52-4K7-Yageo-datasheet-155367611.pdf?src-supplier=Farnell, Construction=Cylindrical, JESD-609 Code=e3, Lead Diameter=0.55mm, Mounting Technology="Through Hole", Packaging="Tape and Reel", Pins=2, Pricing="1=0.1, 10=0.034, 25=0.0284, 50=0.0246, 100=0.0217, 250=0.01832, 500=0.01626, 1000=0.01448 (USD)", Reach SVHC Compliant=Yes, RoHS=Yes, RoHS Compliant=Yes, Stock=3480, Supplier=Digikey, Technology="CARBON FILM", Terminal Finish=Tin, Termination=Wire
S1 S2: "Heat Sink Full Brick DC/DC Converter Aluminum Top Mount", Package=None, Availability=Unavailable, MF="Samtec Inc.", MP=TS-1109, Price=None, SnapEDA_Link=https://www.snapeda.com/parts/TS-1109/Samtec%20Inc./view-part/106451/?ref=snap

## Via types
v1: diameter 1.27, hole 0.711, Top Layer to Bottom Layer, 38 vias
v2: diameter 0.6, hole 0.3, Top Layer to Bottom Layer, 1 vias

## Nets (pads, with @x,y where several pads share a name; then routed paths per layer and width w, separated by ;. In a path a pad name is that pad's centre, name@x,y a point inside that pad or via, vN(x,y) a via of type N, cw(c..) or ccw(c..) an arc to the next point about the centre after c; other vN are vias at no path point)
3V3: C1.1 C6.1 C7.2 J1.06 J2.04 J3.01 J4.03 J5.01 MD1.2 R1.1 R4.1 R8.2 | length 258.4
  Top Layer w0.254: v1@78.613,105.918 v1(78.613,106.172) ; MD1.2@86.601,88.392 MD1.2 ; J5.01@124.079,106.68 J5.01 ; 132.969,87.1 133.118,87.249 ; 136.757,87.249 136.906,87.1
  Top Layer w0.508: v1(68.707,76.835) 68.707,88.058 C6.1 ; v1(74.168,115.57) 75.819,113.919 J4.03 ; v1@78.613,105.918 80.391,104.14 R8.2 ; MD1.2@86.601,88.392 83.969,88.392 83.693,88.668 83.693,89.876 83.185,90.384 83.185,91.226 83.82,91.861 83.82,96.647 v1(87.757,100.584) 99.314,100.584 105.41,106.68 J5.01@124.079,106.68 ; J3.01 125.77,61.595 C1.1 132.882,68.707 134.366,68.707 136.15,70.491 136.15,73.793 136.906,74.549 136.906,87.1 ; 132.969,87.1 132.969,85.465 133.344,85.09 J2.04 ; 133.118,87.249 136.757,87.249
  Bottom Layer w0.254: J1.06@57.658,77.089 J1.06 ; 62.992,71.606 63.141,71.755 ; v1@68.453,77.089 v1(68.707,76.835) ; C6.1@69.85,89.361 C6.1 ; 71.098,107.464 71.098,107.674 ; v1@78.486,106.045 v1(78.613,106.172) ; 80.772,95.355 80.921,95.504
  Bottom Layer w0.508: J1.06 v1@68.453,77.089 ; 62.992,71.606 62.992,60.159 R4.1 69.959,56.73 71.786,54.903 R1.1 ; 63.141,71.755 63.627,71.755 v1(68.707,76.835) ; C6.1@69.85,89.361 69.85,95.25 70.104,95.504 77.176,95.504 C7.2 80.772,95.355 ; 71.098,107.464 72.517,106.045 v1@78.486,106.045 ; 71.098,107.674 73.025,109.601 73.025,111.252 74.168,112.395 v1(74.168,115.57) ; 80.921,95.504 v1(83.82,95.504) ; R8.2 83.781,102.02 84.074,101.727 86.614,101.727 v1(87.757,100.584) ; J5.01 128.143,106.045 132.715,101.473 132.715,87.249 J2.04
Boot: C8.1 J1.02 MD1.25 R4.2 S1.3 | length 90.5
  Top Layer w0.254: J1.02 66.421,78.613 R4.2 72.643,61.508 C8.1 76.581,59.15 S1.3 ; MD1.25 103.728,73.025 107.928,73.025 108.077,72.876 v1(108.077,67.183)
  Bottom Layer w0.254: C8.1 81.494,66.421 107.315,66.421 v1(108.077,67.183)
Buzzer_-: J5.02 Q1.3 | length 35.1
  Top Layer w0.254: Q1.3 93.262,117.05 96.139,114.173 106.68,114.173 111.379,109.474 123.825,109.474 J5.02
EN: C9.2 J1.03 MD1.3 R1.2 S2.3 | length 91.6
  Top Layer w0.254: MD1.3 88.074,87.059 v1(89.535,85.598) ; R1.2 89.561,43.877 S2.3@94.387,43.877 ; S2.3 S2.3@94.387,43.877 ; v1(98.044,69.088) 98.044,58.888 C9.2 94.274,51.919 93.132,50.777 93.132,45.132 S2.3@94.387,43.877
  Bottom Layer w0.254: J1.03 57.788,84.706 58.931,84.706 60.325,83.312 84.56,83.312 85.217,83.969 85.217,86.36 85.366,86.509 85.576,86.509 86.487,85.598 v1(89.535,85.598) 89.535,77.764 98.044,69.255 v1(98.044,69.088)
GND: C1.2 C6.2 C7.1 C8.2 C9.1 C10.2 C11.2 D1.C J1.01 J2.03 J3.04 J4.02 J6.01 J7.01 J8.01 MD1.1 MD1.15 MD1.38 MD1.39 Q1.1 S1.1 S1.2 S2.1 S2.2 | length 341.6
  Top Layer w0.254: C6.2 74.93,101.854 D1.C 74.676,106.972 74.654,106.994 74.654,111.23 74.803,111.379 J4.02 78.867,111.379 J6.01 87.293,116.332 Q1.1 ; C8.2 78.312,66.508 C10.2 89.449,70.359 MD1.15 89.772,72.412 89.772,74.037 95.999,80.264 94.164,80.264 92.329,80.264 92.329,82.099 94.164,82.099 95.999,82.099 95.999,83.934 94.164,83.934 92.329,83.934 92.329,87.757 90.81,89.276 86.987,89.276 MD1.1 ; v1(84.201,90.805) 84.395,90.611 85.102,90.611 86.114,89.599 MD1.1 ; S2.1 S2.2 100.913,53.479 C9.1 99.401,55.245 108.077,55.245 C11.2 120.523,55.372 J3.04 122.073,54.128 123.303,54.128 C1.2 ; v1(114.173,56.642) 114.173,59.944 v1(115.824,61.595) ; v1(118.618,103.124) 114.876,103.124 114.814,103.186 113.349,103.186 J7.01 113.069,103.036 113.069,102.11 106.68,95.721 106.68,90.043 106.236,89.599 MD1.38 MD1.1 ; v2(119.507,66.675) 118.618,67.564 118.618,70.065 121.158,72.605 121.158,81.788 121.92,82.55 J2.03
  Bottom Layer w0.254: J1.01 62.992,89.789 68.326,84.455 70.104,84.455 C6.2 ; S1.1 S1.2 74.676,60.325 74.676,64.262 73.257,65.681 73.257,65.891 73.874,66.508 C8.2 ; C7.1 80.772,85.366 80.623,85.217 78.994,85.217 C6.2 ; C10.2 85.833,58.987 95.405,58.987 C9.1 ; v1(84.201,90.805) 84.328,90.678 84.328,90.424 83.185,89.281 C6.2 ; v1(114.173,56.642) 119.275,51.54 119.485,51.54 J3.04 ; v1(115.824,61.595) 115.824,62.611 118.872,65.659 118.872,66.04 v2(119.507,66.675) ; v1(118.618,103.124) 118.618,104.902 118.237,105.283 111.125,105.283 109.347,107.061 109.347,109.728 111.379,111.76 J8.01
Limit: J8.02 R9.1 | length 6
  Top Layer w0.254: R9.1 117.856,118.237 119.507,116.586 J8.02
NetC10_1: C10.1 S1.4 | length 13.7
  Top Layer w0.254: S1.4 77.375,53.285 C10.1
NetC11_1: C11.1 S2.4 | length 10
  Top Layer w0.254: S2.4 104.085,47.023 104.855,47.023 C11.1
NetD1_A: D1.A R8.1 | length 25.1
  Top Layer w0.254: D1.A 78.613,102.108 80.391,100.33 84.074,100.33 85.09,101.346 87.082,101.346 87.336,101.6 88.178,101.6 88.432,101.346 95.885,101.346 96.774,102.235 96.774,103.991 96.625,104.14 R8.1
NetMD1_12: MD1.12 R9.2 | length 56.9
  Top Layer w0.254: MD1.12 86.987,75.306 87.706,75.306 88.049,74.963 88.049,74.892 88.392,74.549 89.535,74.549 90.551,75.565 90.551,76.962 v1(91.821,78.232) ; v1(103.251,98.806) 103.505,98.806 v1(107.696,102.997)
  Bottom Layer w0.254: v1(91.821,78.232) 92.146,78.232 104.545,90.631 104.545,97.512 v1(103.251,98.806) ; R9.2 105.498,105.195 v1(107.696,102.997)
NetMD1_13: MD1.13 R5.2 | length 40.5
  Top Layer w0.254: v1(83.312,99.314) 83.312,96.433 82.804,95.925 82.804,95.083 83.312,94.575 83.312,92.201 83.185,92.074 83.185,91.944 82.677,91.436 82.677,90.174 83.185,89.666 83.185,74.508 83.334,74.359 MD1.13
  Bottom Layer w0.254: R5.2 81.876,101.512 83.312,100.076 v1(83.312,99.314)
NetMD1_30: MD1.30 R3.2 | length 34.5
  Top Layer w0.254: MD1.30 109.538,79.439 115.316,85.217 115.316,88.011 v1(115.57,88.265)
  Bottom Layer w0.254: v1(115.57,88.265) 123.991,96.686 R3.2
NetMD1_31: MD1.31 R2.2 | length 29
  Top Layer w0.254: MD1.31 109.03,80.709 v1(113.157,84.836)
  Bottom Layer w0.254: v1(113.157,84.836) 125.642,84.836 R2.2
NetQ1_2: Q1.2 R5.1 | length 10.2
  Top Layer w0.254: Q1.2 90.551,115.062 94.361,111.252 94.361,110.004 94.212,109.855 93.003,109.855 R5.1
"reset sw": J6.02 MD1.7 | length 45.1
  Top Layer w0.254: v1(80.264,114.3) 80.264,117.983 81.153,118.872 J6.02 ; v1(84.201,85.852) 84.201,82.191 84.35,82.042 86.601,82.042 MD1.7
  Bottom Layer w0.254: v1(80.264,114.3) 80.264,102.108 82.042,100.33 82.042,98.044 83.566,96.52 84.241,96.52 84.836,95.925 84.836,91.607 85.217,91.226 85.217,90.384 84.836,90.003 84.836,87.459 84.245,86.868 84.245,85.896 v1(84.201,85.852)
RX_ESP: J1.04 MD1.35 | length 85.1
  Top Layer w0.254: MD1.35 103.728,85.725 v1(108.458,85.725)
  Bottom Layer w0.254: J1.04 80.772,82.169 81.661,81.28 81.661,73.533 85.344,69.85 96.437,69.85 97.028,69.259 97.028,68.667 97.623,68.072 98.465,68.072 98.846,68.453 103.338,68.453 104.608,69.723 109.833,69.723 110.109,69.999 110.109,84.074 v1(108.458,85.725)
RX_GSM: J7.03 MD1.28 | length 41
  Top Layer w0.254: MD1.28 109.538,76.899 v1(115.697,83.058) 115.785,82.97 116.713,82.97 118.618,81.065 118.618,89.545 118.872,89.799 118.872,98.022 118.723,98.171 J7.03
RX_M8N: J3.02 MD1.11 | length 52.4
  Top Layer w0.254: MD1.11 87.947,76.899 v1(89.154,75.692) ; v1(91.567,74.295) 94.117,74.295 94.371,74.041 96.647,74.041 v1(98.425,75.819) ; v1(107.95,75.692) 119.253,64.389 v1(124.46,64.389) ; J3.02 121.983,59.118 124.523,59.118 v1(124.587,59.182)
  Bottom Layer w0.254: v1(89.154,75.692) 90.424,74.422 91.44,74.422 v1(91.567,74.295) ; v1(98.425,75.819) 107.823,75.819 v1(107.95,75.692) ; v1(124.46,64.389) 124.46,59.309 v1(124.587,59.182)
SCL: J2.02 R3.1 | length 9.6
  Top Layer w0.254: v1(131.826,80.137) 131.889,80.073 134.81,80.073 J2.02
  Bottom Layer w0.254: R3.1 131.826,83.273 v1(131.826,80.137)
SDA: J2.01 R2.1 | length 11.7
  Top Layer w0.254: R2.1 130.644,70.065 132.461,71.882 132.461,77.321 132.61,77.47 J2.01
TX_ESP: J1.05 MD1.34 | length 88.3
  Top Layer w0.254: MD1.34 110.406,84.519 110.723,84.836 v1(110.998,84.836)
  Bottom Layer w0.254: J1.05 62.23,79.629 64.135,81.534 80.391,81.534 80.899,81.026 80.899,73.279 84.963,69.215 96.353,69.215 96.52,69.048 96.52,68.457 97.413,67.564 98.675,67.564 99.056,67.945 103.549,67.945 104.819,69.215 110.744,69.215 110.998,69.469 v1(110.998,84.836)
TX_GSM: J7.02 MD1.27 | length 43.3
  Top Layer w0.254: v1(100.076,83.058) 100.076,78.498 102.622,75.952 103.341,75.952 MD1.27 ; J7.02 v1(116.967,100.711)
  Bottom Layer w0.254: v1(100.076,83.058) 105.664,88.646 109.474,88.646 110.871,90.043 116.63,90.043 116.967,90.38 v1(116.967,100.711)
TX_M8N: J3.03 MD1.10 | length 56.8
  Top Layer w0.254: v1(84.201,67.691) v1(84.201,73.152) ; v1(84.201,78.105) 86.6,78.105 MD1.10 ; v1(91.313,67.691) 91.313,65.024 v1(92.964,63.373)
  Bottom Layer w0.254: v1(84.201,67.691) v1(91.313,67.691) ; v1(84.201,73.152) v1(84.201,78.105) ; v1(92.964,63.373) 109.728,63.373 116.586,56.515 J3.03
V_in: J4.04 J7.05 | length 70.5
  Top Layer w0.508: J4.04 75.079,116.459 74.93,116.608 74.93,118.999 75.819,119.888 80.242,119.888 80.54,120.186 80.54,122.301 84.455,122.301 85.344,123.19 98.552,123.19 v1(99.822,124.46)
  Bottom Layer w0.508: v1(99.822,124.46) 99.822,106.553 J7.05
pads on no net: J4.01 J7.04 MD1.4 MD1.5 MD1.6 MD1.8 MD1.9 MD1.14 MD1.16 MD1.17 MD1.18 MD1.19 MD1.20 MD1.21 MD1.22 MD1.23 MD1.24 MD1.26 MD1.29 MD1.32 MD1.33 MD1.36 MD1.37